# Altium PCB PCB1.PcbDoc
Units mm, origin at the board's own origin, x right, y up, seen from the top; angles counter-clockwise.
Board outline 152.4 x 101.6 mm, 2 copper layers (Top Layer, Bottom Layer); 12 components, 13 nets, 37 pads, 0 vias.
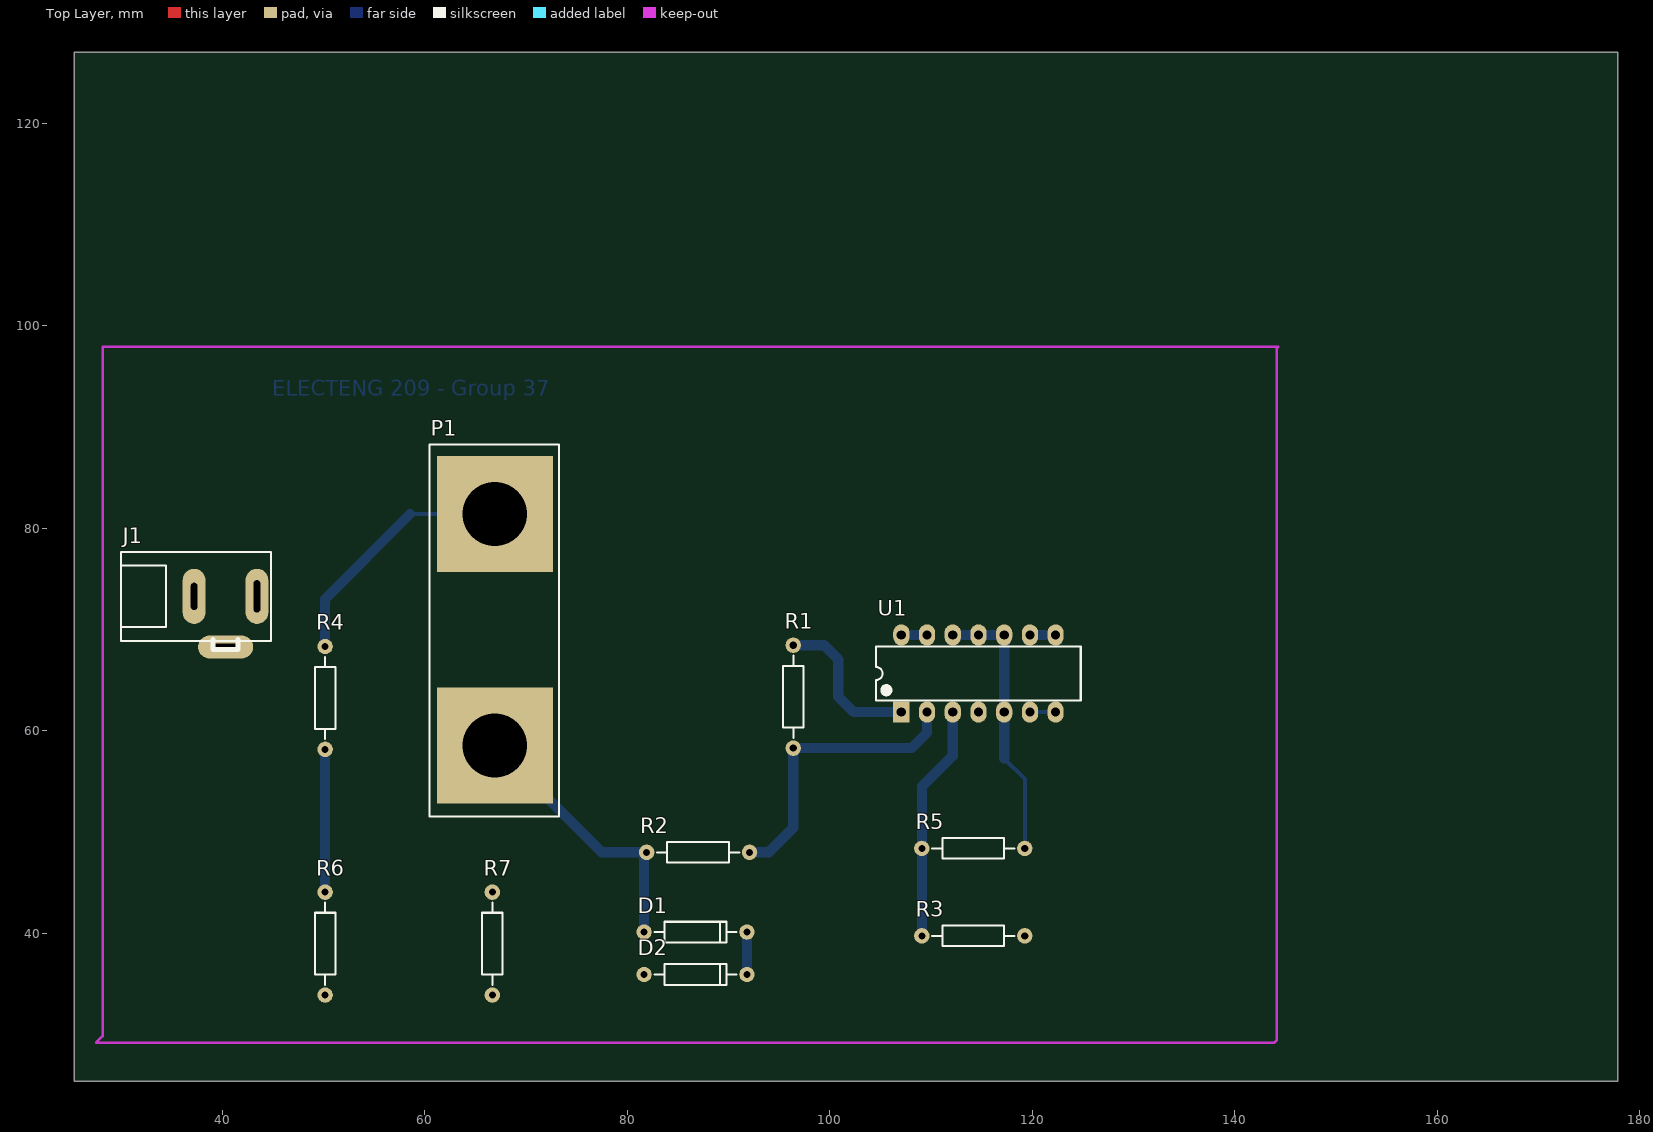
[diagram p0: Top Layer view]
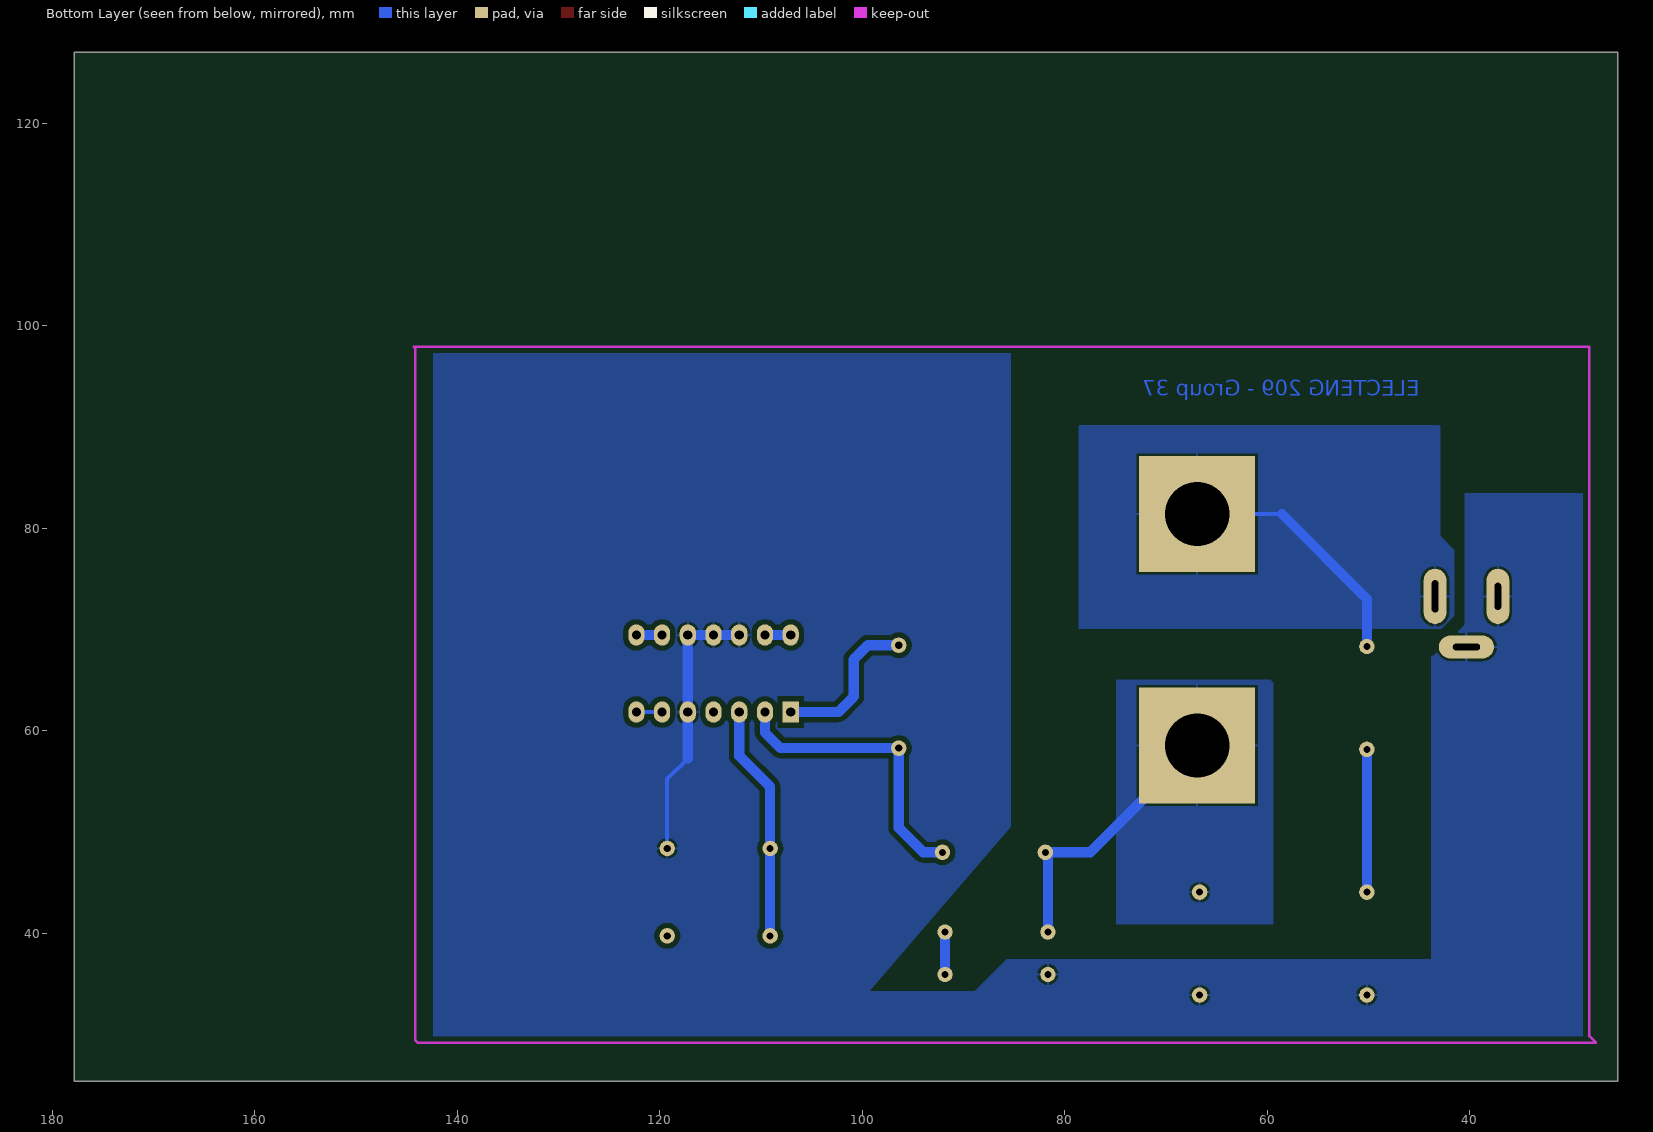
[diagram p1: Bottom Layer view, seen from below]

## Layer stack, top to bottom
Top Solder: solder mask 0.0102, Solder Resist, Dk 3.5
Top Layer: signal copper 0.0356
Dielectric 1: dielectric 0.32, FR-4, Dk 4.8
Bottom Layer: signal copper 0.0356
Bottom Solder: solder mask 0.0102, Solder Resist, Dk 3.5

## Board outline
25.4,25.4 177.8,25.4 177.8,127 25.4,127

## Design rules (kind name [scope] priority, off if disabled: settings)
Clearance [All] p1: gap=0.5
PolygonConnect [All] p1: connectstyle=Relief reliefconductorwidth=0.254 reliefentries=4 polygonreliefangle="90 Angle" airgapwidth=0.254
RoutingVias [All] p1: holewidth=0.711 width=1.27 viastyle="Through Hole" minholewidth=0.711 minwidth=1.27 maxholewidth=0.711 maxwidth=1.27
SolderMaskExpansion [All] p1: expansion=0.102
UnpouredPolygon [All] p1: allowunpoured=FALSE
Width [All] p1: maxlimit=10 minlimit=0.4 preferedwidth=1 minimp=50.000000 maximp=50.000000 favimp=50.000000
29 further rules are at their usual default settings.

## Components (designator, comment, footprint, x,y, rotation, side; value= is the part's Value field where it differs from the comment)
D1 "3.1V" AXIAL-DIODE-0.4 86.741,40.132 r0 top
D2 "3.1V" AXIAL-DIODE-0.4 86.741,35.941 r0 top
J1 "AC Input Socket" AC-Socket 43.434,73.279 r0 top
P1 "Dual Banana Plugs" "Dual Banana Plug" 66.929,69.977 r270 top
R1 "10k" AXIAL-0.4 96.393,63.373 r270 top
R2 "10k" AXIAL-0.4 86.995,48.006 r180 top
R3 "10k" AXIAL-0.4 114.173,39.751 r0 top
R4 "9.1k" AXIAL-0.4 50.165,63.246 r90 top
R5 "10k" AXIAL-0.4 114.173,48.387 r180 top
R6 "380" AXIAL-0.4 50.165,38.989 r90 top
R7 "1" AXIAL-0.4 66.675,38.989 r90 top
U1 "MCP6024-I/P" DIP-14 114.681,65.659 r90 top

## Footprints (in the part's own frame and the unit in brackets; to place one, negate y for a bottom-side part, rotate by r counter-clockwise, add the part's x,y. Pads: shape width x height; smd on the part's side, far side on the other; paste and mask are expansions set on the pad)
AC-Socket [mm]
  oval 2.25x5.45 hole 0.635 slot 3.175 at 90 deg: 1(0,0)
  oval 5.45x2.25 hole 0.635 slot 2.667 at 0 deg: 2(-3.1,-5)
  oval 2.25x5.45 hole 0.635 slot 2.667 at 90 deg: 3(-6.2,0)
  silkscreen extent -13.4,-5.25 1.4,4.4, body extent -13.4,-4.4 1.4,4.4, height 10
AXIAL-0.4 [mil]
  round 60 hole 27.56: 1(-200,0) 2(200,0)
  silkscreen extent -160,-40 160,40, body extent -120,-40 120,40, height 81
AXIAL-DIODE-0.4 [mil]
  round 60 hole 27.56: 1(-200,0) 2(200,0)
  silkscreen extent -160,-40 160,40, body extent -120,-41 120,41, height 82
DIP-14 [mm] "DIP; 14 Leads; Row Spacing 7.62 mm; Pitch 2.54 mm"
  rect 2.1x1.6 hole 0.9: 1(-3.81,7.62)
  oval 2.1x1.6 hole 0.9: 2(-3.81,5.08) 3(-3.81,2.54) 4(-3.81,0) 5(-3.81,-2.54) 6(-3.81,-5.08) 7(-3.81,-7.62) 8(3.81,-7.62) 9(3.81,-5.08) 10(3.81,-2.54) 11(3.81,0) 12(3.81,2.54) 13(3.81,5.08) 14(3.81,7.62)
  silkscreen extent -2.65,-10.1 2.65,10.1, body extent -3.6,-10.1 3.6,10.1, height 5.1
"Dual Banana Plug" [mm] "Connector; 2 Position"
  rect 11.43x11.43 hole 6.35: 1(-11.43,0) 2(11.43,0)
  silkscreen extent -18.29,-6.48 18.41,6.35, body extent -17.38,-5.99 17.43,5.99, height 5.5

## Part data
D1 D2: library part Zener, "Zener Diode"
J1: library part "AC Input"
P1: "M6 Holes"
R1 R2 R3 R4 R5 R6 R7: library part Res, "Through Hole Resistor"
U1: "Rail-to-Rail Input/Output, 10 MHz Operational Amplifier, 14-Pin PDIP, Industrial Temperature"

## Nets (pads, with @x,y where several pads share a name; then routed paths per layer and width w, separated by ;. In a path a pad name is that pad's centre, name@x,y a point inside that pad or via, vN(x,y) a via of type N, cw(c..) or ccw(c..) an arc to the next point about the centre after c; other vN are vias at no path point)
3V3: U1.4
GND: D2.1 J1.2 J1.3 R5.1 R6.1 R7.1 U1.5 U1.10 U1.11 U1.12 | length 27
  Bottom Layer w0.4: 117.221,57.277 119.253,55.245 R5.1
  Bottom Layer w1: U1.12 U1.11 U1.10 U1.5 117.221,57.277
I_SENS: D1.1 P1.2 R2.2 R7.2 | length 27
  Bottom Layer w1: P1.2 77.47,48.006 R2.2 ; D1.1 R2.2@81.661,47.752
NetD1_2: D1.2 D2.2 | length 4.2
  Bottom Layer w1: D2.2 D1.2
NetR1_1: R1.1 U1.1 | length 15.6
  Bottom Layer w1: R1.1 99.441,68.453 100.838,67.056 100.838,63.373 102.362,61.849 U1.1
NetR1_2: R1.2 R2.1 U1.2 | length 29.1
  Bottom Layer w1: R2.1 93.98,48.006 96.393,50.419 R1.2 108.077,58.293 109.601,59.817 U1.2
NetR3_1: R3.1 R5.2 U1.3 | length 23.4
  Bottom Layer w1: R3.1 R5.2 109.093,54.483 112.141,57.531 U1.3
NetR4_1: R4.1 R6.2 | length 14.1
  Bottom Layer w1: R6.2 R4.1
NetU1_6: U1.6 U1.7 | length 2.5
  Bottom Layer w0.4: U1.6 U1.7
NetU1_8: U1.8 U1.9 | length 2.5
  Bottom Layer w1: U1.9 U1.8
NetU1_13: U1.13 U1.14 | length 2.5
  Bottom Layer w1: U1.14 U1.13
V1.65: R3.2
VIN: J1.1 P1.1 R4.2 | length 24.9
  Bottom Layer w0.4: 58.547,81.407 P1.1
  Bottom Layer w1: R4.2 50.165,73.025 58.547,81.407

## Polygon pours and split planes (outlines as drawn)
GND on Bottom Layer "GND Plane" (solid, remove dead copper, pour order 11): 85.344,126.873 85.344,50.546 99.314,34.29 100.371,33.061 101.6,34.29 97.917,30.607 101.6,25.4 143.764,25.4 143.891,25.527 142.367,27.051 142.367,127 85.471,127 85.344,127.127
GND on Bottom Layer "GND Plane" (solid, remove dead copper, pour order 19): 101.6,34.29 101.6,25.527 25.527,25.527 25.4,25.4 25.527,25.527 25.527,37.465 69.723,37.465 80.518,37.465 84.455,37.465 85.725,37.465 88.9,34.29
GND on Bottom Layer "GND Plane" (solid, remove dead copper, pour order 21): 25.527,39.497 25.527,83.439 40.513,83.439 40.513,70.485 43.561,67.437 43.815,67.437 43.815,39.624 43.815,29.845 25.527,29.845
VIN on Bottom Layer "VIN Plane" (solid, remove dead copper, pour order 23): 42.926,89.916 42.926,79.248 41.529,77.851 41.529,74.422 41.529,71.374 42.799,70.104 78.613,70.104 78.613,90.17 43.053,90.17 42.926,90.117 42.926,89.535
I_SENS on Bottom Layer "I_SENS Plane" (solid, remove dead copper, pour order 27): 59.436,40.894 74.93,40.894 74.93,65.024 59.69,65.024 59.436,64.77 59.436,40.894

## Keep-outs
Keep-Out Layer:
  lines w0.254: 27.559,29.21 143.891,29.21 144.145,29.464 144.145,97.79 144.272,97.917 28.194,97.917 28.194,29.845 27.559,29.21

## Other copper
Bottom Layer:
  text "ELECTENG 209 - Group 37" at 44.958,93.091 h1.52